# Altium PCB Irradiance Sensor.PcbDoc
Units mil, origin at the board's own origin, x right, y up, seen from the top; angles counter-clockwise.
Board outline 5229.9 x 1970.66 mil, 2 copper layers (Top Layer, Bottom Layer); 69 components, 52 nets, 238 pads, 38 vias.
Unrouted connection lines stored in the file: 55.
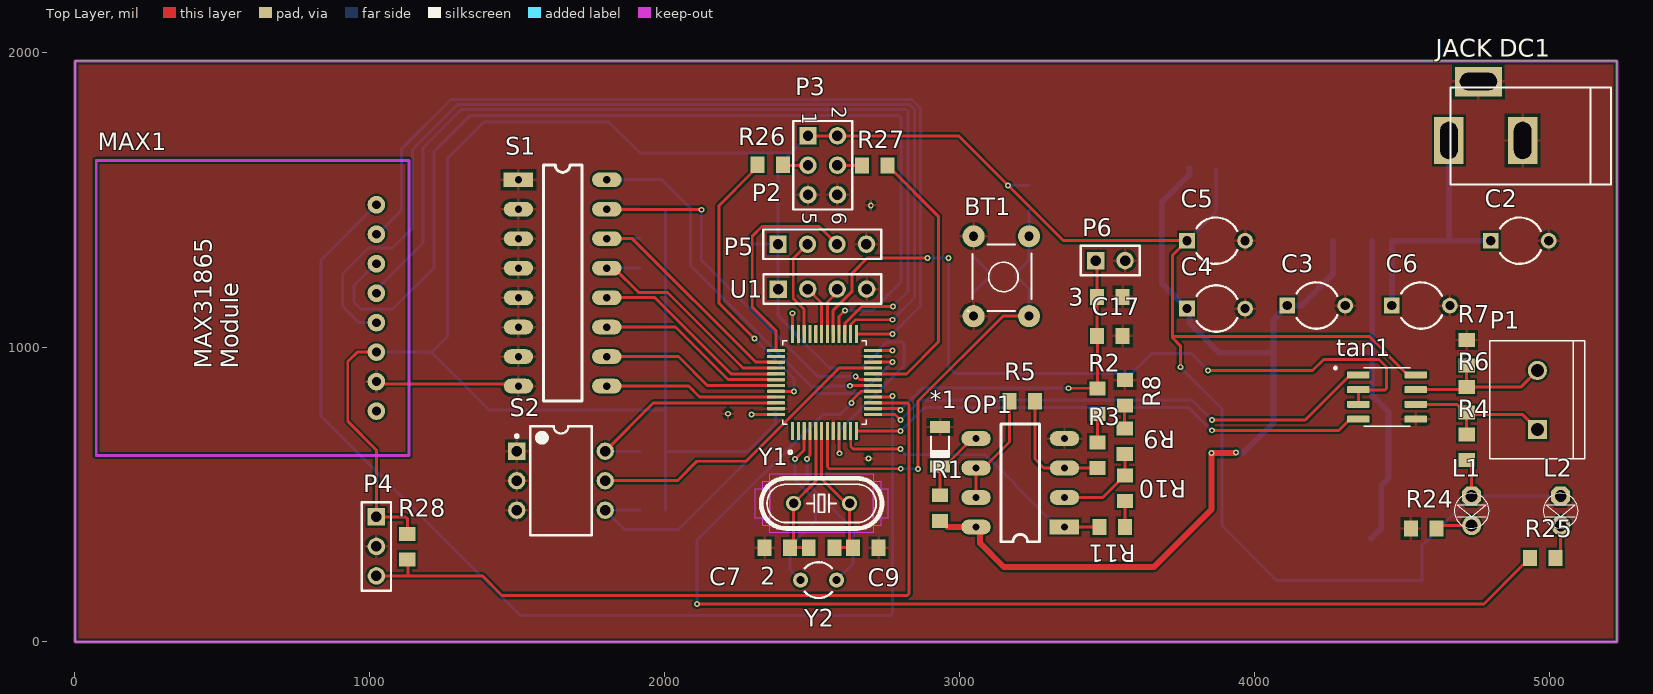
[diagram p0: Top Layer view]
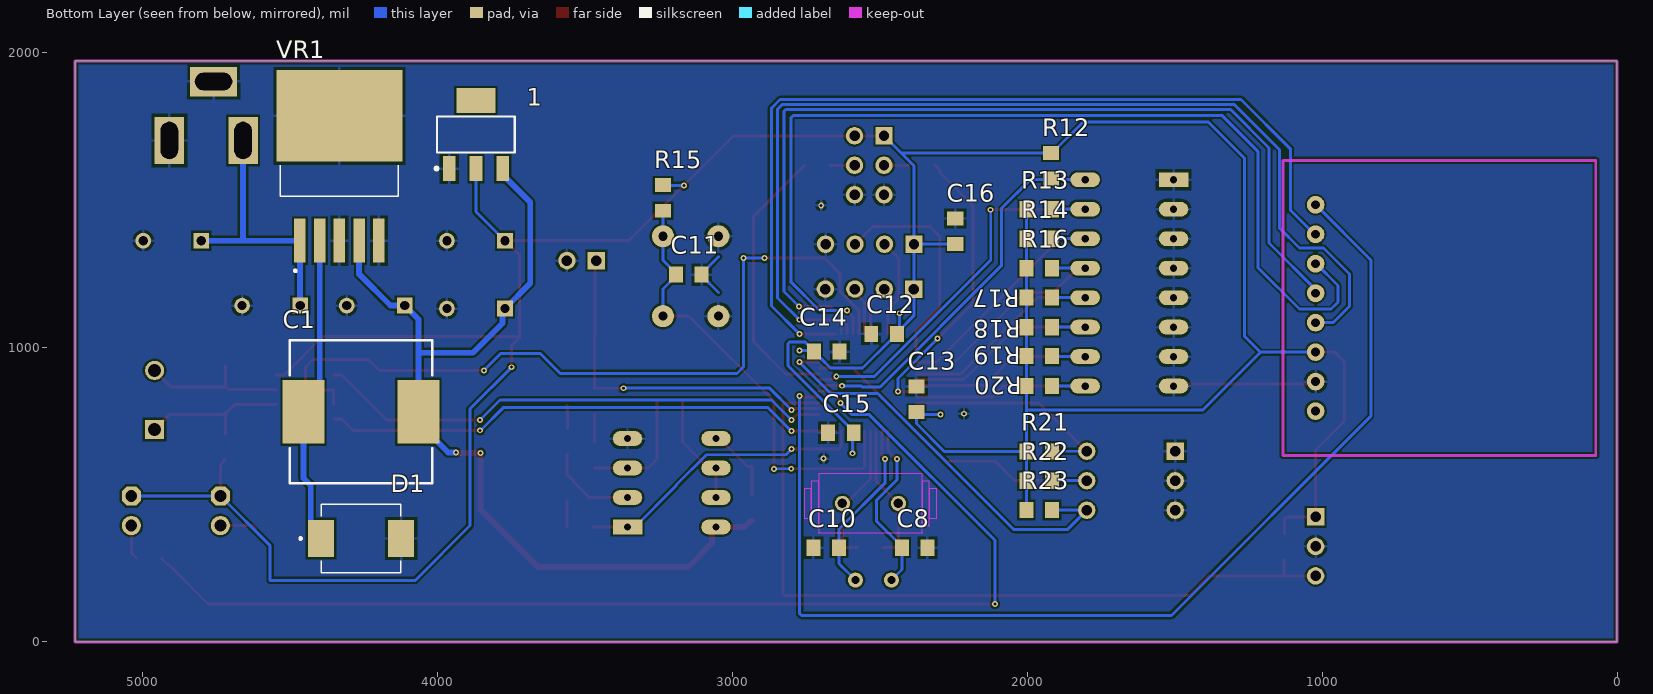
[diagram p1: Bottom Layer view, seen from below]

## Layer stack, top to bottom
Top Solder: solder mask 0.4, Solder Resist, Dk 3.5
Top Layer: signal copper 1.4
Dielectric 1: dielectric 12.6, FR-4, Dk 4.8
Bottom Layer: signal copper 1.4
Bottom Solder: solder mask 0.4, Solder Resist, Dk 3.5

## Board outline
0.1,0.04 0.1,1970.7 5229.99,1970.7 5229.99,0.04

## Design rules (kind name [scope] priority, off if disabled: settings)
Clearance [All] p1: gap=7 ignorepadtopadclearanceinfootprint=TRUE
PolygonConnect [All] p1: connectstyle=Relief reliefconductorwidth=10 reliefentries=4 polygonreliefangle="90 Angle" airgapwidth=10
RoutingVias [All] p1: holewidth=28 width=50 viastyle="Through Hole" minholewidth=28 minwidth=50 maxholewidth=28 maxwidth=50
SolderMaskExpansion [All] p1: expansion=4 istentingtop=FALSE
Width "Power Supply" [InNet('12+V')] p1: maxlimit=20 minlimit=20 preferedwidth=20 checkconnectedcopper=TRUE
Width "Power Supply_1" [InNet('5V')] p2: maxlimit=20 minlimit=20 preferedwidth=20 checkconnectedcopper=TRUE
Width "Power Supply_2" [InNet('Net2_1')] p3: maxlimit=20 minlimit=20 preferedwidth=20
Width Width_1 [All] p4: maxlimit=20 minlimit=10 preferedwidth=10
30 further rules are at their usual default settings.

## Classes and differential pairs
component class "Irradiance Sensor": 1 *1 BT1 C3 C5 C8 C10 C11 C13 C15 C17 D1 "JACK DC1" L1 L2 MAX1 OP1 P1 P2 P3 P4 P5 P6 R1 R3 R7 R8 R9 R10 R11 R12 R13 R14 R15 R16 R17 R18 R19 R20 R21 R22 R23 R24 R25 R26 R27 R28 S1 S2 tan1 U1 VR1 Y1 Y2

## Components (designator, comment, footprint, x,y, rotation, side; value= is the part's Value field where it differs from the comment)
1 "LM1117" SOT230P700X180-4N 3870.1,1721.04 r90 bottom
2 "Res" RESC2012X11N 2532.1,320.04 r180 top value=1k
3 "Res" RESC2012X11N 3510.1,1170.49 r180 top value=1k
*1 "BZV55" SOD-80C 2934.02,662.24 r90 top
BT1 "Nut Nhan 4 Chan Cam 6x6" "Nut Nhan 4 Chan Cam 6x6" 3243.79,1363.1 r270 top
C1 "L127H" INDP122122X80N 4260.1,781.04 r180 bottom
C2 "Cap2" CAPR5-4X5 4900.1,1361.04 r0 top value=680uF
C3 "Cap2" CAPR5-4X5 4210.1,1141.04 r0 top value=1000uF
C4 "Cap2" CAPR5-4X5 3870.1,1131.04 r0 top value=10uF
C5 "Cap2" CAPR5-4X5 3870.1,1361.04 r0 top value=10uF
C6 "Cap2" CAPR5-4X5 4564.95,1141.04 r0 top value=100uF
C7 "Cap" RESC2012X11N 2382.1,320.04 r0 top
C8 "Cap" RESC2012X11N 2382.1,320.04 r0 bottom
C9 "Cap" RESC2012X11N 2682.1,320.04 r180 top
C10 "Cap" RESC2012X11N 2682.1,320.04 r180 bottom
C11 "Cap" RESC2012X11N 3147.79,1246.1 r180 bottom
C12 "Cap" RESC2012X11N 2486.1,1045.04 r0 bottom
C13 "Cap" RESC2012X11N 2376.1,823.04 r90 bottom
C14 "Cap" RESC2012X11N 2680.1,985.04 r180 bottom
C15 "Cap" RESC2012X11N 2632.1,710.04 r0 bottom
C16 "Cap" RESC2012X11N 2244.1,1393.04 r90 bottom
C17 "Cap" RESC2012X11N 3510.1,1038.04 r0 top
D1 "SS34" DIOM7959X265N 4260.1,351.04 r180 bottom
"JACK DC1" "JACK DC 5.5" "JACK DC 5.5" 4785.1,1801.04 r180 top value="Jac DC"
L1 "LED 3mm" LED-3MM-RED 4737,495 r270 top
L2 "LED 3mm" LED-3MM-GREEN 5039,495 r270 top
MAX1 "MAX31865" MAX31865 1022.1,783.04 r90 top
OP1 "MCP6002" DIP8 3356.1,390.04 r180 top
P1 "Header 2" TE_282837-2 4960.1,821.04 r90 top
P2 "SWD" HDR1X4 2384.47,1349.24 r0 top
P3 "Header 3X2" HDR2X3 2486.1,1716.85 r270 top
P4 "DS18B20 Input" HDR1X3 1022.1,424.32 r270 top
P5 "Debug" HDR1X4 2385.1,1197.04 r0 top
P6 "PV input" HDR1X2 3461.49,1293.54 r0 top
R1 "Res" RESC2012X11N 2934.02,454.43 r270 top value=1k
R2 "Res" RESC2012X11N 3467.82,816.36 r270 top value=1k
R3 "Res" RESC2012X11N 3467.82,633.76 r270 top value=1k
R4 "Res" RESC2012X11N 4720.1,661.04 r270 top value=1k
R5 "Res" RESC2012X11N 3212.49,816.36 r0 top value=1k
R6 "Res" RESC2012X11N 4720.1,821.04 r270 top value=1k
R7 "Res" RESC2012X11N 4720.1,981.04 r270 top value=1k
R8 "Res" RESC2012X11N 3561.1,845.04 r270 top value=1k
R9 "Res" RESC2012X11N 3560.1,681.04 r270 top value=1k
R10 "Res" RESC2012X11N 3561.1,522.13 r270 top value=1k
R11 "Res" RESC2012X11N 3517.86,390.04 r180 top value=1k
R12 "Res" RESC2012X11N 1920.1,1615.04 r270 bottom value=1k
R13 "Res" RESC2012X11N 1959.7,1467.68 r180 bottom value=1k
R14 "Res" RESC2012X11N 1960.1,1367.96 r180 bottom value=1k
R15 "Res" RESC2012X11N 3235.79,1506.1 r90 bottom value=1k
R16 "Res" RESC2012X11N 1960.1,1267.83 r180 bottom value=1k
R17 "Res" RESC2012X11N 1960.1,1168.78 r180 bottom value=1k
R18 "Res" RESC2012X11N 1960.1,1067.82 r180 bottom value=1k
R19 "Res" RESC2012X11N 1960.1,970.04 r180 bottom value=1k
R20 "Res" RESC2012X11N 1960.1,868.04 r180 bottom value=1k
R21 "Res" RESC2012X11N 1959.7,646.46 r180 bottom value=1k
R22 "" RESC2012X11N 1960.1,547.03 r180 bottom value=1k
R23 "" RESC2012X11N 1959.7,447.47 r180 bottom value=1k
R24 "Res" RESC2012X11N 4574.33,384.89 r0 top value=1k
R25 "Res" RESC2012X11N 4978.1,285.04 r0 top value=1k
R26 "Res" RESC2012X11N 2358.1,1619.04 r180 top value=1k
R27 "Res" RESC2012X11N 2713.1,1616.04 r180 top value=1k
R28 "Res" RESC2012X11N 1127.1,323.04 r90 top value=1k
S1 "SW DIP-8" DIP16 1504.1,1568.04 r0 top
S2 "SW DIP-3" DIP-6 1648.4,547.03 r0 top
tan1 "MAX3485EESA+" SOIC127P600X175-8N 4450.1,831.04 r0 top
U1 "STM32F103C8T6" QFP50P900X900X160-48N 2542.1,880.04 r90 top
VR1 "LM2596S-5.0" TO170P1524X483-6N 4333.17,1613 r90 bottom
Y1 "8Mhz" HC49US 2532.1,470.04 r0 top
Y2 "32,768k" R38 2522.1,210.04 r270 top

## Footprints (in the part's own frame and the unit in brackets; to place one, negate y for a bottom-side part, rotate by r counter-clockwise, add the part's x,y. Pads: shape width x height; smd on the part's side, far side on the other; paste and mask are expansions set on the pad)
CAPR5-4X5 [mm] "Capacitor; 2 Leads"
  rect 1.35x1.35 hole 0.8: 1(-2.5,0)
  round 1.35 hole 0.8: 2(2.5,0)
  silkscreen extent -1.69,-2 1.82,2
DIOM7959X265N [mm]
  rect 2.25x3.18 smd: A(3.455,0) C(-3.455,0)
  silkscreen extent -5.3,-2.95 3.44,2.95
DIP8 [mil]
  rect 100x50 hole 25: 1(0,0)
  oval 100x50 hole 25: 2(0,-100) 3(0,-200) 4(0,-300) 5(300,-300) 6(300,-200) 7(300,-100) 8(300,0)
  silkscreen extent 85,-350 215,50
DIP16 [mil]
  rect 100x50 hole 25: 1(0,0)
  oval 100x50 hole 25: 2(0,-100) 3(0,-200) 4(0,-300) 5(0,-400) 6(0,-500) 7(0,-600) 8(0,-700) 9(300,-700) 10(300,-600) 11(300,-500) 12(300,-400) 13(300,-300) 14(300,-200) 15(300,-100) 16(300,0)
  silkscreen extent 85,-750 215,50
DIP-6 [mm] "DIP; 6 Leads; Row Spacing 7.62 mm; Pitch 2.54 mm"
  rect 1.5x1.5 hole 0.9: 1(-3.81,2.54)
  round 1.5 hole 0.9: 2(-3.81,0) 3(-3.81,-2.54) 4(3.81,-2.54) 5(3.81,0) 6(3.81,2.54)
  silkscreen extent -3.93,-4.7 2.65,4.7, body extent -3.55,-4.7 3.55,4.7, height 5.46
HC49US [mil]
  round 52 hole 32: 1(-95,0) 2(95,0)
  Keep-Out Layer region: 225,-50 200,-50 200,50 225,50
  Keep-Out Layer region: 200,-75 175,-75 175,75 200,75
  Keep-Out Layer region: -200,-50 -225,-50 -225,50 -200,50
  Keep-Out Layer region: -175,-75 -200,-75 -200,75 -175,75
  Keep-Out Layer region: 175,-100 -175,-100 -175,100 175,100
  silkscreen extent -205,-85 205,85
HDR1X2 [mm] "Connector; Header; 2 Position"
  rect 1.5x1.5 hole 0.9: 1(0,0)
  round 1.5 hole 0.9: 2(2.54,0)
  silkscreen extent -1.27,-1.27 3.81,1.27
HDR1X3 [mm] "Connector; Header; 3 Position"
  rect 1.5x1.5 hole 0.9: 1(0,0)
  round 1.5 hole 0.9: 2(2.54,0) 3(5.08,0)
  silkscreen extent -1.27,-1.27 6.35,1.27
HDR1X4 [mm] "Connector; Header; 4 Position"
  rect 1.5x1.5 hole 0.9: 1(0,0)
  round 1.5 hole 0.9: 2(2.54,0) 3(5.08,0) 4(7.62,0)
  silkscreen extent -1.27,-1.27 8.89,1.27
HDR2X3 [mm] "Connector; Header; 3x2 Position"
  rect 1.5x1.5 hole 0.9: 1(0,0)
  round 1.5 hole 0.9: 2(0,2.54) 3(2.54,0) 4(2.54,2.54) 5(5.08,0) 6(5.08,2.54)
  silkscreen extent -1.27,-1.27 6.35,3.81
INDP122122X80N [mm] "Precision Wire Wound Inductor, 2-Leads, Body 12.15x12.15mm, IPC Medium Density"
  rect 3.6x5.5 smd: 1(-4.95,0) 2(4.95,0)
  silkscreen extent -6.15,-6.15 6.15,6.15, body extent -6.15,-6.15 6.15,6.15, height 8
"JACK DC 5.5" [mil] "Jac DC input"
  rect 100x160 hole 59.06 slot 125.98 at 90 deg: 1(125,100) 2(-125,100)
  rect 160x100 hole 59.06 slot 125.98 at 0 deg: 3(25,-100)
  silkscreen extent -425,-80 120,250, body extent -410,-105 134,269, height 434
LED-3MM-GREEN [mil]
  oct 65x65 hole 40: 1(0,0)
  round 65 hole 40: 2(100,0)
  silkscreen extent -9,-59 109,59, body extent -15,-70 112,60, height 182
LED-3MM-RED [mil]
  oct 65x65 hole 40: 1(0,0)
  round 65 hole 40: 2(100,0)
  silkscreen extent -9,-59 109,59, body extent -27,-77 117,80, height 181
MAX31865 [mil]
  round 60 hole 30: 1(0,0) 2(100,0) 3(200,0) 4(300,0) 5(400,0) 6(500,0) 7(600,0) 8(700,0)
  Keep-Out Layer lines w10: -150,950 850,950 850,-110 40,-110 -90,-110 -150,-110 -150,400 -150,950
"Nut Nhan 4 Chan Cam 6x6" [mil] "SW button 4pin, 250 x250 mil"
  round 75 hole 31: 1(-13,-8) 1(258,-8) 2(-13,-196) 2(258,-196)
  silkscreen extent 15,-215 240,0, body extent -31,-225 281,19, height 276
QFP50P900X900X160-48N [mm]
  rrect50% 1.56x0.28 smd: 1(-4.18,2.75) 2(-4.18,2.25) 3(-4.18,1.75) 4(-4.18,1.25) 5(-4.18,0.75) 6(-4.18,0.25) 7(-4.18,-0.25) 8(-4.18,-0.75) 9(-4.18,-1.25) 10(-4.18,-1.75) 11(-4.18,-2.25) 12(-4.18,-2.75) 25(4.18,-2.75) 26(4.18,-2.25) 27(4.18,-1.75) 28(4.18,-1.25) 29(4.18,-0.75) 30(4.18,-0.25) 31(4.18,0.25) 32(4.18,0.75) 33(4.18,1.25) 34(4.18,1.75) 35(4.18,2.25) 36(4.18,2.75)
  rrect50% 0.28x1.56 smd: 13(-2.75,-4.18) 14(-2.25,-4.18) 15(-1.75,-4.18) 16(-1.25,-4.18) 17(-0.75,-4.18) 18(-0.25,-4.18) 19(0.25,-4.18) 20(0.75,-4.18) 21(1.25,-4.18) 22(1.75,-4.18) 23(2.25,-4.18) 24(2.75,-4.18) 37(2.75,4.18) 38(2.25,4.18) 39(1.75,4.18) 40(1.25,4.18) 41(0.75,4.18) 42(0.25,4.18) 43(-0.25,4.18) 44(-0.75,4.18) 45(-1.25,4.18) 46(-1.75,4.18) 47(-2.25,4.18) 48(-2.75,4.18)
  silkscreen extent -6.15,-3.6 3.6,3.6
R38 [mm] "Crystal, Thru-Hole; 2 Leads; Body 3.1 x 8.2 mm (Dia.xH)"
  round 1.3 hole 0.7: 1(0,1.55) 2(0,-1.55)
  silkscreen extent -1.55,-1.19 1.55,1.17
RESC2012X11N [mm] "Chip Resistor, 2-Leads, Body 2.00x1.25mm, IPC Medium Density"
  rect 1.2x1.4 smd: 1(-1.1,0) 2(1.1,0)
  body extent -1.1,-0.72 1.1,0.73, height 1.1
SOD-80C [mm] "MELF Diode, 2-Leads, Body 3.50x1.53mm, IPC Medium Density"
  rect 1x1.75 smd: 1(-1.7,0) 2(1.7,0)
  silkscreen extent -0.85,-0.77 0.85,0.78, body extent -1.85,-0.8 1.85,0.8, height 1.6
SOIC127P600X175-8N [mm]
  rrect25% 1.97x0.59 smd: 1(-2.475,1.905) 2(-2.475,0.635) 3(-2.475,-0.635) 4(-2.475,-1.905) 5(2.475,-1.905) 6(2.475,-0.635) 7(2.475,0.635) 8(2.475,1.905)
  silkscreen extent -4.54,-2.52 2,2.59
SOT230P700X180-4N [mm] "SOT223, 4-Leads, Body 6.50x7.00mm (avg), Pitch 2.30mm, IPC Medium Density"
  rect 2.15x1.1 smd: 1(-2.925,2.3) 2(-2.925,0) 3(-2.925,-2.3)
  rect 2.15x3.35 smd: 4(2.925,0)
  silkscreen extent -3.05,-3.35 1.55,3.53, body extent -1.85,-3.35 1.85,3.35, height 1.8
TE_282837-2 [mm]
  rect 1.65x1.65 hole 1.1: 1(-2.54,0)
  round 1.65 hole 1.1: 2(2.54,0)
  silkscreen extent -5.08,-4.1 5.08,4.1, body extent -5.63,-4.26 5.13,3.94, height 9.79
TO170P1524X483-6N [mm]
  rect 3.79x0.99 smd: 1(-6.4,3.4) 2(-6.4,1.7) 3(-6.4,0) 4(-6.4,-1.7) 5(-6.4,-3.4)
  rect 7.88x10.84 smd paste-6: 6(4.35,0)
  silkscreen extent -9.1,-5.08 0.09,5.08

## Part data
BT1: "Nut Nhan 4 Chan 6x6mm", Ma_Hang=MH004584, Ten="Nút Nhấn 4 Chân 6x6x5MM DIP"
C2 C3 C4 C5 C6: "Capacitor", PackageDescription="Capacitor; 2 Leads", PackageReference=CAPR5-4X5, Published=23-Sep-2002, Publisher="Altium Limited"
D1: "Diode Schottky 40V 3A Surface Mount SMC _DO-214AB_", Package="DO-214AB-214 ON Semiconductor", Availability=Unavailable, MF="ON Semiconductor", MP=SS34, Price=None, SnapEDA_Link=https://www.snapeda.com/parts/SS34/ON%20Semiconductor/view-part/4631325/?ref=snap
L1: library part "LED 3mm Do", "Cắm", Chung_Loai=Cắm, Don_Vi=Con, Ma_Hang=MH003892, Ten_Linh_Kien="Led 3MM Phủ Đỏ (10c)"
L2: library part "LED 3mm Xanh La", "Cắm", Chung_Loai=Cắm, Don_Vi=Con, Ma_Hang=MH001054, Ten_Linh_Kien="Led 3MM Phủ Xanh (10c)"
P1: "Header, 2-Pin", LatestRevisionDate=17-Jul-2002, LatestRevisionNote="Re-released for DXP Platform.", Publisher="Altium Limited"
P2 P5: library part "Header 4", "Header, 4-Pin", LatestRevisionDate=17-Jul-2002, LatestRevisionNote="Re-released for DXP Platform.", Publisher="Altium Limited"
P3: "Header, 3-Pin, Dual row", LatestRevisionDate=17-Jul-2002, LatestRevisionNote="Re-released for DXP Platform.", Publisher="Altium Limited"
P4: library part "Header 3", "Header, 3-Pin", LatestRevisionDate=17-Jul-2002, LatestRevisionNote="Re-released for DXP Platform.", Publisher="Altium Limited"
P6: library part "Header 2", "Header, 2-Pin", LatestRevisionDate=17-Jul-2002, LatestRevisionNote="Re-released for DXP Platform.", Publisher="Altium Limited"
R22 R23: library part Res
S1: "DIP Switch, 8 Position, SPST", LatestRevisionDate=17-Jul-2002, LatestRevisionNote="Re-released for DXP Platform.", PackageDescription="DIP Switch; 16 Leads", PackageReference=DIP_SW_8WAY_SMD, Published=24-Mar-1999, Publisher="Altium Limited"
S2: "DIP Switch, 3 Position, SPST", Code_JEDEC=MO-001-AM, LatestRevisionDate=17-Jul-2002, LatestRevisionNote="Re-released for DXP Platform.", PackageReference=DIP-6, Published=24-Mar-1999, Publisher="Altium Limited"
tan1: "1/1 Transceiver Half RS422, RS485 8-SOIC", Package="SOIC-8 Maxim", Availability=Unavailable, MF="Maxim Integrated", MP=MAX3485EESA+, Price=None, SnapEDA_Link=https://www.snapeda.com/parts/MAX3485EESA%2B/Maxim%20Integrated/view-part/558005/?ref=snap
U1: "ARMÂ® CortexÂ®-M3 STM32F1 Microcontroller IC 32-Bit 72MHz 64KB _64K x 8_ FLASH", Package="LQFP-48 STMicroelectronics", Availability=Unavailable, MF=STMicroelectronics, MP=STM32F103C8T6, Price=None, SnapEDA_Link=https://www.snapeda.com/parts/STM32F103C8T6/STMicroelectronics/view-part/52195/?ref=snap
VR1: "SIMPLE SWITCHER&reg; 4.5V to 40V, 3A Low Component Count Step-Down Regulator 5-DDPAK/TO-263", Package="TO-263-5 Texas Instruments", Availability=Good, DigiKey-Purchase-URL=https://snapeda.com/shop?store=DigiKey&id=15588, MF="Texas Instruments", Mouser-Purchase-URL=https://snapeda.com/shop?store=Mouser&id=15588, MP=LM2596S-5.0/NOPB, Price=None, SnapEDA_Link=https://www.snapeda.com/parts/LM2596S-5.0/NOPB/Texas%20Instruments/view-part/15588/?ref=snap, Texas_Instruments-Purchase-URL=https://snapeda.com/shop?store=Texas+Instruments&id=15588
Y1: library part DIP-CRYSTAL-8MHZ-20PF-20PPM-60R(HC49US), "DIP Crystal 8MHz-20pF-20ppm-60R;", Package=None, Availability=Unavailable, MF=Xinhunjing, MP=49S8M, Price=None, SnapEDA_Link=https://www.snapeda.com/parts/49S8M/Xinhunjing/view-part/105661/?ref=snap
Y2: library part XTAL, "Crystal Oscillator", LatestRevisionDate=17-Jul-2002, LatestRevisionNote="Re-released for DXP Platform.", PackageDescription="Crystal, Thru-Hole; 2 Leads; Body 3.1 x 8.2 mm (Dia.xH)", PackageReference=R38, Published=8-Jun-2000, Publisher="Altium Limited"
C7 C8 C9 C10: Cap=20pF
C11: Cap=0.01uF
C12 C13 C14 C15 C16 C17: Cap=0.1uF

## Via types
v1: diameter 20, hole 10, Top Layer to Bottom Layer, 38 vias

## Nets (pads, with @x,y where several pads share a name; then routed paths per layer and width w, separated by ;. In a path a pad name is that pad's centre, name@x,y a point inside that pad or via, vN(x,y) a via of type N, cw(c..) or ccw(c..) an arc to the next point about the centre after c; other vN are vias at no path point)
3.3V: 1.2 C5.1 C12.1 C13.1 C14.1 C15.1 C16.1 L1.1 L2.1 MAX1.3 P2.1 P3.1 P3.2 P4.1 P5.1 R4.2 R12.1 R13.1 R14.1 R15.2 R16.1 R17.1 R18.1 R19.1 R20.1 R21.1 R22.1 R23.1 R28.2 tan1.8 U1.9 U1.24 U1.36 U1.48 | length 12892.3
  Top Layer w10: MAX1.3 957.1,983.04 925.1,951.04 925.1,748.44 1022.1,651.44 P4.1 1121.24,424.32 1127.1,418.47 R28.2 ; v1(2295,771.61) 2295.07,771.69 U1.48 U1.48 ; v1(2433.1,1115.04) 2433.46,1114.67 2433.46,1044.97 U1.36 ; P3.1 P3.2 2996.83,1716.85 3352.64,1361.04 C5.1 3723.1,1312.46 3723.1,1036.04 ; U1.9 2591.82,714.96 2591.82,641.31 v1(2593.1,640.04) ; U1.24 2706.8,988.17 2772.96,988.17 v1(2773.1,988.04) ; v1(3749.1,932.04) 3749.1,1005.04 3723.1,1031.04 3723.1,1036.04 ; tan1.8 4520.37,906.04 4390.37,1036.04 3723.1,1036.04 ; R4.2@4724.03,617.73 R4.2 4737,600.83 L1.1
  Bottom Layer w10: MAX1.3 1209.1,983.04 ; R23.1 2003,546.63 R22.1 2003,547.43 R21.1 ; R13.1 2003.4,1467.28 R14.1 R16.1 R17.1 R18.1 R19.1 R20.1 2003,867.63 2003,787.04 ; C16.1 2244.58,1349.24 P2.1 ; v1(2295,771.61) 2367.98,771.61 C13.1 2376.1,741.04 2281.52,646.46 R21.1 ; C12.1@2433.1,1054.73 C12.1 ; v1(2433.1,1115.04) C12.1@2433.1,1058.67 ; P3.1 2427.59,1658.34 ; v1(2593.1,640.04) 2593.1,705.73 C15.1 2588.79,713.97 2812.1,937.28 2812.1,1012.18 2806.24,1018.04 2755.03,1018.04 2744.59,1007.59 2742.03,1007.59 2723.4,988.97 C14.1 ; v1@2775.01,989.95 v1(2773.1,988.04) 2726.4,988.04 C14.1 ; v1(3165.1,1548.14) 3230.59,1548.14 3231.85,1549.41 R15.2 ; v1(3749.1,932.04) 3890.1,791.04 3890.1,395.04 4076.1,209.04 4568.1,209.04 4568.1,326.1 L1.1 L2.1 ; C5.1 3870.1,1459.46 1.2 ; 1209.1,983.04 1264.1,1038.04 1264.1,1642.04 1385.1,1763.04 1811.47,1763.04 1916.16,1658.34 2427.59,1658.34 ; 1209.1,983.04 1405.1,787.04 2003,787.04 ; R21.1 2003,787.04 ; P2.1 2384.47,1615.22 2427.59,1658.34 ; P2.1 2385.1,1348.61 P5.1 2385.1,1106.67 C12.1@2433.1,1058.67 ; C12.1@2433.1,1058.67 2442.79,1048.97 C12.1 ; C12.1 2442.79,1041.1 2461.41,1022.48 2465.35,1022.48 2558.79,929.04 2667.4,929.04 2700.85,962.48 2704.78,962.48 2723.4,981.1 C14.1
5V: 1.3 C1.2 C3.1 C4.1 OP1.8 R1.2 VR1.4 | length 3187.6
  Top Layer w20: R1.2 2937.96,411.12 2959.04,390.04 OP1.8 3056.24,390.04 3070.1,376.18 3070.1,335.04 3151.1,254.04 3659.1,254.04 3855.1,450.04 v1@3855.1,637.04 ; v1(3854.1,641.14) 3935.2,641.14 v1@3936.1,642.04
  Bottom Layer w20: 1.3 3779.55,1585.21 3686.1,1491.76 3686.1,1216.61 C4.1 3780.1,1122.61 3780.1,1081.04 3880.1,981.04 4065.22,981.04 ; v1(3938.1,643.14) 3964.72,643.14 4065.22,743.63 C1.2 4065.22,981.04 ; VR1.4 4266.24,1247.18 4160.1,1141.04 C3.1 4065.22,1094.58 4065.22,981.04
12+V: "JACK DC1.1" C2.1 C6.1 VR1.1 | length 894.9
  Bottom Layer w10: C6.1 C6.1@4467.03,1141.54
  Bottom Layer w20: C6.1@4467.03,1141.54 VR1.1 4660.1,1361.04 ; 4660.1,1701.04 4660.1,1361.04 ; C2.1 4660.1,1361.04
A: P1.1 R4.1 R6.2 tan1.6 | length 521.2
  Top Layer w10: tan1.6 4687.85,806.04 4716.16,777.73 R6.2 ; R4.1 R6.2 ; P1.1 4910.1,771.04 4726.79,771.04 R6.2
B: P1.2 R6.1 R7.2 tan1.7 | length 512.9
  Top Layer w10: tan1.7 4711.79,856.04 R6.1 ; R7.2 R6.1 ; P1.2 4903.4,864.34 R6.1
BOOT0: R26.2 U1.44 | length 990.5
  Top Layer w10: v1(2304.04,1028.98) 2184.1,1148.92 2184.1,1480.04 2296.17,1592.11 2296.17,1600.41 R26.2 ; U1.44 2377.77,850.27 2438.86,850.27 v1(2439.1,850.04)
  Bottom Layer w10: v1(2304.04,1028.98) 2439.1,893.92 v1(2439.1,850.04)
BOOT1: R27.1 U1.20 | length 936.5
  Top Layer w10: U1.20 2707.18,909.05 2820.05,909.05 2928.1,1017.1 2928.1,1444.34 R27.1
GND: 1.1 3.1 "JACK DC1.2" "JACK DC1.3" *1.2 BT1.2 C2.2 C3.2 C4.2 C5.2 C6.2 C7.1 C8.1 C9.1 C10.1 C11.2 C12.2 C13.2 C14.2 C15.2 C16.2 C17.2 D1.A MAX1.2 OP1.4 P2.4 P3.5 P3.6 P4.2 P5.4 P6.2 R7.1 R8.1 R24.1 S1.1 S1.2 S1.3 S1.4 S1.5 S1.6 S1.7 S1.8 S2.1 S2.2 S2.3 tan1.5 U1.8 U1.23 U1.35 U1.47 VR1.3 VR1.5 VR1.6 | length 656.4
  Top Layer w10: MAX1.2 1029.6,875.54 1496.6,875.54 S1.8
  Bottom Layer w10: 3047.79,1185.47 3104.48,1242.16 C11.2 3104.48,1250.04 3047.79,1306.73
  other v1: 2691.1,622.04 2214.87,774.11 2699.1,1481.04
Irradiance: OP1.1 R11.2 U1.11 | length 1010.5
  Top Layer w10: U1.11 2631.19,714.96 2631.19,662.94 2640.14,653.99 v1(2799.94,653.99) ; OP1.1 R11.2
  Bottom Layer w10: v1(2799.94,653.99) 2818.89,635.04 3088.42,635.04 3191.24,532.22 3191.24,529.89 3331.1,390.04 OP1.1
LED: R25.1 U1.17 | length 3918.6
  Top Layer w10: v1(2110.1,129.04) 4778.79,129.04 4912.23,262.48 4916.17,262.48 4934.79,281.1 R25.1 ; v1(2634.1,810.04) 2636.01,811.95 2636.01,820.6 2665.92,850.51 U1.17
  Bottom Layer w10: v1(2110.1,129.04) 2110.1,345.04 2536.1,771.04 2595.1,771.04 v1(2634.1,810.04)
MISO2: MAX1.5 U1.27 | length 3165.7
  Top Layer w10: U1.27 2611.51,1045.11 2611.51,1081.36 2668.18,1138.04 v1(2774.1,1138.04)
  Bottom Layer w10: MAX1.5 1022.1,1195.04 1180.1,1353.04 1180.1,1675.75 1310.25,1805.9 2819.24,1805.9 2825.1,1800.04 2825.1,1189.04 v1(2774.1,1138.04)
MOSI2: MAX1.6 U1.28 | length 3409.5
  Top Layer w10: U1.28 2591.31,1104.25 v1(2611.1,1124.04)
  Bottom Layer w10: MAX1.6 1020.03,1283.04 946.1,1209.11 946.1,1152.54 969.61,1129.04 1077.1,1129.04 1218.22,1270.16 1218.22,1664.34 1338.91,1785.04 2795.24,1785.04 2801.1,1779.18 2801.1,1220.04 2705.1,1124.04 v1(2611.1,1124.04)
Net*1_1: *1.1 OP1.5 R1.1 | length 298.2
  Top Layer w10: R1.1 *1.1 2948.78,595.38 3023.44,670.04 3023.44,671.56 3041.92,690.04 OP1.5 3068.32,690.04 OP1.5@3086.79,708.51
NetC1_1: C1.1 D1.C VR1.2 | length 1057.1
  Bottom Layer w20: D1.C 4430.41,385.33 4430.41,530.92 4454.98,555.48 C1.1 4400.1,835.92 VR1.2
NetL1_2: L1.2 R24.2 | length 123.6
  Top Layer w10: R24.2 4627.75,395 L1.2
NetL2_2: L2.2 R25.2 | length 118.8
  Top Layer w10: R25.2 5039,302.63 L2.2 L2.2@5040.1,393.9
NetOP1_2: OP1.2 R9.2 R10.1 | length 311.2
  Top Layer w10: OP1.2 3485.69,490.04 3538.54,542.88 3538.54,546.82 3557.16,565.44 R10.1 3561.1,636.73 R9.2
NetOP1_3: OP1.3 R3.2 R5.2 | length 420.8
  Top Layer w10: R5.2 3255.8,620.33 3286.1,590.04 OP1.3 3467.4,590.04 R3.2
NetP3_3: P3.3 R26.1 | length 85.6
  Top Layer w10: R26.1 2403.59,1616.85 P3.3
NetP3_4: P3.4 R27.2 | length 84
  Top Layer w10: P3.4 2668.98,1616.85 R27.2
NetR2_2: R2.2 R3.1 | length 96
  Top Layer w10: R3.1 R2.2
NetR8_2: R8.2 R9.1 | length 77.8
  Top Layer w10: R9.1 3560.1,800.73 R8.2
NetR10_2: R10.2 R11.1 | length 88.8
  Top Layer w10: R10.2 3561.17,478.75 R11.1
NSS2: MAX1.7 U1.25 | length 3097.3
  Top Layer w10: U1.25 2650.37,1044.55 2650.88,1044.04 v1(2772.1,1044.04)
  Bottom Layer w10: MAX1.7 1026.1,1383.04 1108.1,1465.04 1108.1,1673.04 1274.96,1839.9 2838.46,1839.9 2868.1,1810.26 2868.1,1140.04 v1(2772.1,1044.04)
OSCIN: 2.2 C7.2 U1.5 Y1.1 | length 491.5
  Top Layer w10: C7.2 C7.2@2431.25,325.88 ; 2.2 2437.1,320.04 C7.2@2431.25,325.88 ; U1.5 2512.57,545.51 Y1.1 2437.1,331.73 C7.2@2431.25,325.88
OSCOUT: 2.1 C9.2 U1.6 Y1.2 | length 509.6
  Top Layer w10: U1.6 2532.26,553.51 2615.73,470.04 Y1.2 2627.1,331.73 C9.2 2.1
PB0: R12.2 S1.16 U1.18 | length 1309.5
  Top Layer w10: v1(2629.1,869.04) 2630.26,870.19 U1.18
  Bottom Layer w10: S1.16 1920.1,1568.04 1990.1,1568.04 2088.1,1470.04 2088.1,1276.04 2499.1,865.04 2560.74,865.04 2564.74,869.04 v1(2629.1,869.04)
PB1: R13.2 S1.15 U1.19 | length 1355.8
  Top Layer w10: S1.15 1805.1,1467.04 2124.1,1467.04 v1(2125.1,1466.04) ; v1(2648.01,899.9) 2650.71,899.9 2660.73,889.88 U1.19
  Bottom Layer w10: S1.15 1916.04,1468.04 R13.2 ; v1(2125.1,1466.04) 2124.1,1465.04 2124.1,1295.58 2519.78,899.9 v1(2648.01,899.9)
PB3: R14.2 S1.14 U1.39 | length 859.8
  Top Layer w10: S1.14 1890.4,1368.04 2309.51,948.93 U1.39
  Bottom Layer w10: S1.14 1916.71,1368.04 R14.2
PB4: R16.2 S1.13 U1.40 | length 826.5
  Top Layer w10: S1.13 1829.1,1268.04 1912.1,1185.04 2009.73,1185.04 2265.52,929.25 U1.40
  Bottom Layer w10: S1.13 1916.59,1268.04 R16.2
PB5: R17.2 S1.12 U1.41 | length 793.5
  Top Layer w10: S1.12 1966.64,1168.04 2225.11,909.56 U1.41
  Bottom Layer w10: S1.12 1916.05,1168.04 R17.2
PB6: R18.2 S1.11 U1.42 | length 760
  Top Layer w10: S1.11 2037.1,1068.04 2215.26,889.88 U1.42
  Bottom Layer w10: S1.11 1916.57,1068.04 R18.2
PB7: R19.2 S1.10 U1.43 | length 727.5
  Top Layer w10: S1.10 2046.95,968.04 2144.79,870.19 U1.43
  Bottom Layer w10: S1.10 1914.79,968.04 R19.2
PB8: R20.2 S1.9 U1.45 | length 701.5
  Top Layer w10: S1.9 2081.35,868.04 2118.56,830.82 U1.45
  Bottom Layer w10: S1.9 R20.2
PB9: R21.2 S2.6 U1.46 | length 765.3
  Top Layer w10: S2.6 1962.51,811.14 U1.46
  Bottom Layer w10: S2.6 1915.82,647.03 R21.2
PB10: R22.2 S2.5 U1.21 | length 1185
  Top Layer w10: S2.5 2043.09,547.03 2109.1,613.04 2276.1,613.04 2592.31,929.25 U1.21
  Bottom Layer w10: S2.5 R22.2
PB11: R23.2 S2.4 U1.22 | length 1422
  Top Layer w10: U1.22 U1.22 2773.05,948.98 v1(2773.1,949.04)
  Bottom Layer w10: R23.2 1915.95,447.03 S2.4 1864.39,381.04 2045.56,381.04 2507.56,843.04 2667.1,843.04 v1(2773.1,949.04)
PC14: C8.2 U1.3 Y2.2 | length 598
  Top Layer w10: v1(2442.1,620.04) 2473.2,651.14 U1.3
  Bottom Layer w10: v1(2442.1,620.04) 2442.1,550.04 2512.1,480.04 2512.1,410.67 2425.4,323.97 C8.2 2425.4,245.7 Y2.2
PC15: C10.2 U1.4 Y2.1 | length 597.9
  Top Layer w10: v1(2482.1,620.04) 2482.1,622.74 2492.89,633.53 U1.4
  Bottom Layer w10: v1(2482.1,620.04) 2482.1,540.04 2638.79,383.34 C10.2 2638.79,265.7 Y2.1
READY: MAX1.8 U1.16 | length 3818.8
  Top Layer w10: U1.16 2766.18,830.82 2769.39,834.04 v1(2772.1,834.04)
  Bottom Layer w10: MAX1.8 835.1,1296.04 835.1,766.04 1511.1,90.04 2766.24,90.04 2772.1,95.89 v1(2772.1,834.04)
RST: BT1.1 C11.1 R15.1 U1.7 | length 1552.1
  Top Layer w10: U1.7 2551.94,593.4 2557.8,587.55 2800.63,587.55 v1(2800.74,587.65) ; v1(2859.1,587.14) 2859.1,817.04 3147.16,1105.1 BT1.1@3235.79,1105.1
  Bottom Layer w10: v1(2800.74,587.65) 2856.71,587.65 v1@2857.1,588.04 ; R15.1@3234.65,1461.65 R15.1 3235.79,1376.1 3235.79,1294.73 3191.1,1250.04 C11.1 3191.1,1242.16 3235.79,1197.47 BT1.1@3235.79,1105.1
RX1: P5.2 U1.31 | length 172
  Top Layer w10: P5.2 2532.26,1149.88 U1.31
RX2: tan1.1 U1.13 | length 1773.4
  Top Layer w10: U1.13 2781.37,771.77 v1(2800.1,753.04) ; v1(3856.1,753.14) 4172.59,753.14 4325.49,906.04 tan1.1
  Bottom Layer w10: v1(2800.1,753.04) 2868.1,821.04 3788.2,821.04 v1(3856.1,753.14)
SCK2: MAX1.4 U1.26 | length 3513.7
  Top Layer w10: U1.26 2631.19,1045.11 2631.19,1077.01 2647.22,1093.04 v1(2773.1,1093.04)
  Bottom Layer w10: MAX1.4 963.1,1083.04 907.1,1139.04 907.1,1248.04 995.1,1336.04 1077.1,1336.04 1144.1,1403.04 1144.1,1669.04 1297.96,1822.9 2831.42,1822.9 2847.23,1807.08 2847.23,1167.17 v1(2773.1,1093.04)
SWDCLK: P2.3 U1.37 | length 746.9
  Top Layer w10: U1.37 2377.53,1055.6 2297.1,1136.04 2297.1,1376.04 2330.1,1409.04 2524.67,1409.04 P2.3
SWDIO: P2.2 U1.34 | length 340
  Top Layer w10: U1.34 2473.2,1127.93 2436.1,1165.04 2436.1,1300.87 P2.2
Temp: P4.3 R28.1 U1.15 | length 2659.4
  Top Layer w10: P4.3 1129.1,224.32 ; R28.1 1129.1,277.73 1129.1,224.32 ; U1.15 2823.24,811.14 2829.1,805.28 2829.1,163.89 2823.24,158.04 1448.1,158.04 1381.81,224.32 1129.1,224.32
TX1: P5.3 U1.30 | length 166.2
  Top Layer w10: U1.30 2551.94,1152.88 2585.1,1186.04 P5.3
TX2: tan1.4 U1.12 | length 1780.8
  Top Layer w10: U1.12 2650.7,715.14 v1(2800.1,715.14) ; v1(3855.81,718.09) 4287.54,718.09 4325.49,756.04 tan1.4
  Bottom Layer w10: v1(2800.1,715.14) 2881,796.04 3776.1,796.04 v1@3853.1,719.04
TxEnable: tan1.2 tan1.3 U1.29 | length 2742.6
  Top Layer w10: U1.29 2571.63,1124.83 2636.1,1189.31 2636.1,1251.04 2687.1,1302.04 v1(2892.1,1302.04) ; v1(3843.46,920.55) 4197.61,920.55 4235.1,958.04 4423.1,958.04 4448.1,933.04 4448.1,859.89 4442.24,854.04 4354.66,854.04 tan1.2 tan1.3
  Bottom Layer w10: v1(2892.1,1302.04) 2961.1,1302.04 v1@2962.1,1303.04 ; v1(2962.1,1302.14) 2962.1,934.04 2985.1,911.04 3584.1,911.04 3651.1,978.04 3787.1,978.04 v1@3843.1,922.04
Vin: 3.2 C17.1 P6.1 R2.1 U1.14 | length 1230.7
  Top Layer w10: U1.14 2792.97,791.45 2797.39,787.04 v1(2800.1,787.04) ; v1(3369.33,860.59) 3466.91,860.59 R2.1 3467.82,1037 C17.1 3.2 3466.79,1288.23 P6.1
  Bottom Layer w10: v1(2800.1,787.04) 2875.1,862.04 v1@3369.1,862.04
Vref: OP1.6 OP1.7 R5.1 | length 387.8
  Top Layer w10: OP1.7 OP1.6 3081.1,590.04 3169.19,678.12 R5.1
pads on no net: 1.4 MAX1.1 U1.1 U1.2 U1.10 U1.32 U1.33 U1.38

## Polygon pours and split planes (outlines as drawn)
GND on Top Layer "GND_L01_P000" (solid, pour order 0): 1.47,1969.66 1.47,1.42 5224.48,1.42 5229.4,6.34 5229.4,1970.22 0.92,1970.22 0.1,1971.04
GND on Bottom Layer "GND_L02_P001" (solid, pour order 1): -0.17,1970.97 -0.17,1965.33 -0.17,1.32 5229.81,1.32 5229.93,1.21 5229.93,1971.32 5.1,1971.04 4.1,1971.04

## Keep-outs
Keep-Out Layer:
  the board outline again, w10

## Text inside footprints (layer, text, board x,y; h text height)
MAX1: Top Overlay "MAX31865 / Module" at 554.1,926.11 h60 r90
P3: Top Overlay "6" at 2566.1,1456.85 h50 r270; Top Overlay "5" at 2466.1,1456.85 h50 r270; Top Overlay "2" at 2566.1,1816.85 h50 r270; Top Overlay "1" at 2466.1,1796.85 h50 r270